# Altium PCB PCB_Rapsi_Hat.PcbDoc
Units mm, origin at the board's own origin, x right, y up, seen from the top; angles counter-clockwise.
Board outline 39 x 54 mm, 2 copper layers (Top Layer, Bottom Layer); 21 components, 15 nets, 97 pads, 3 vias.
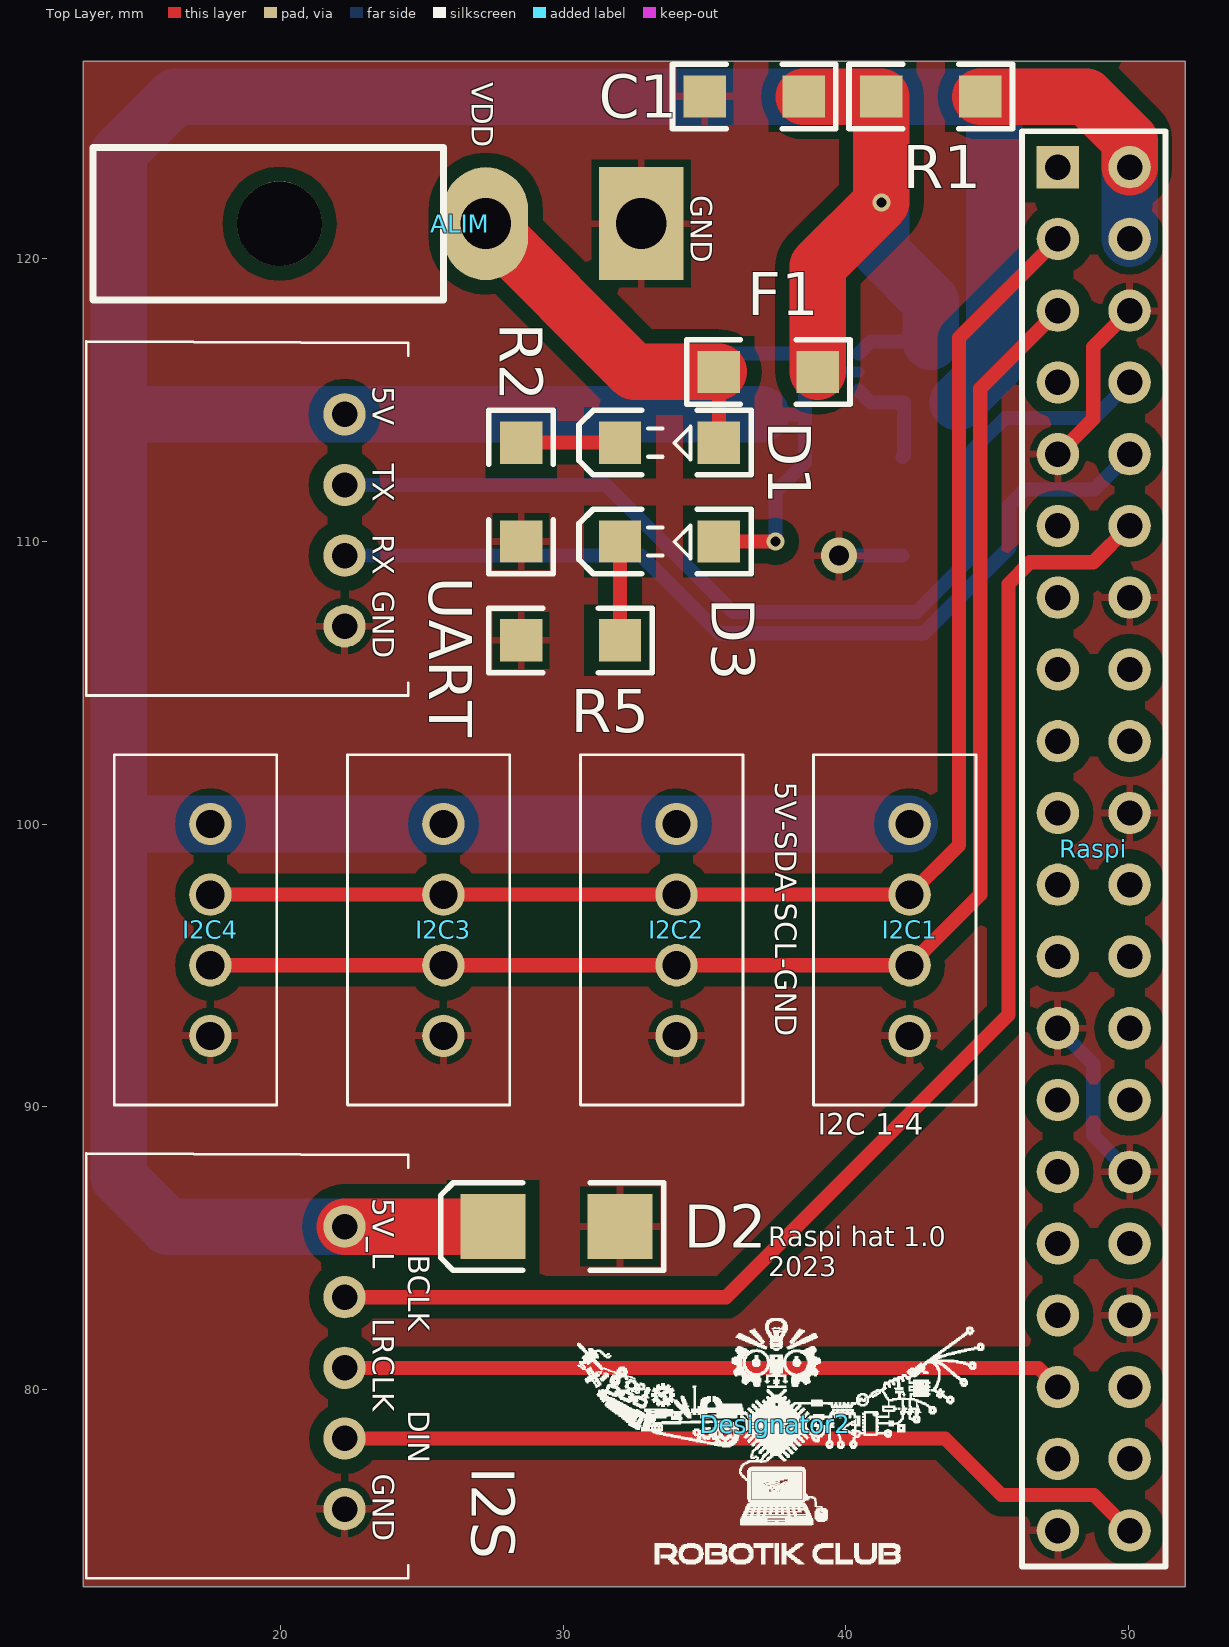
[diagram p0: Top Layer view]
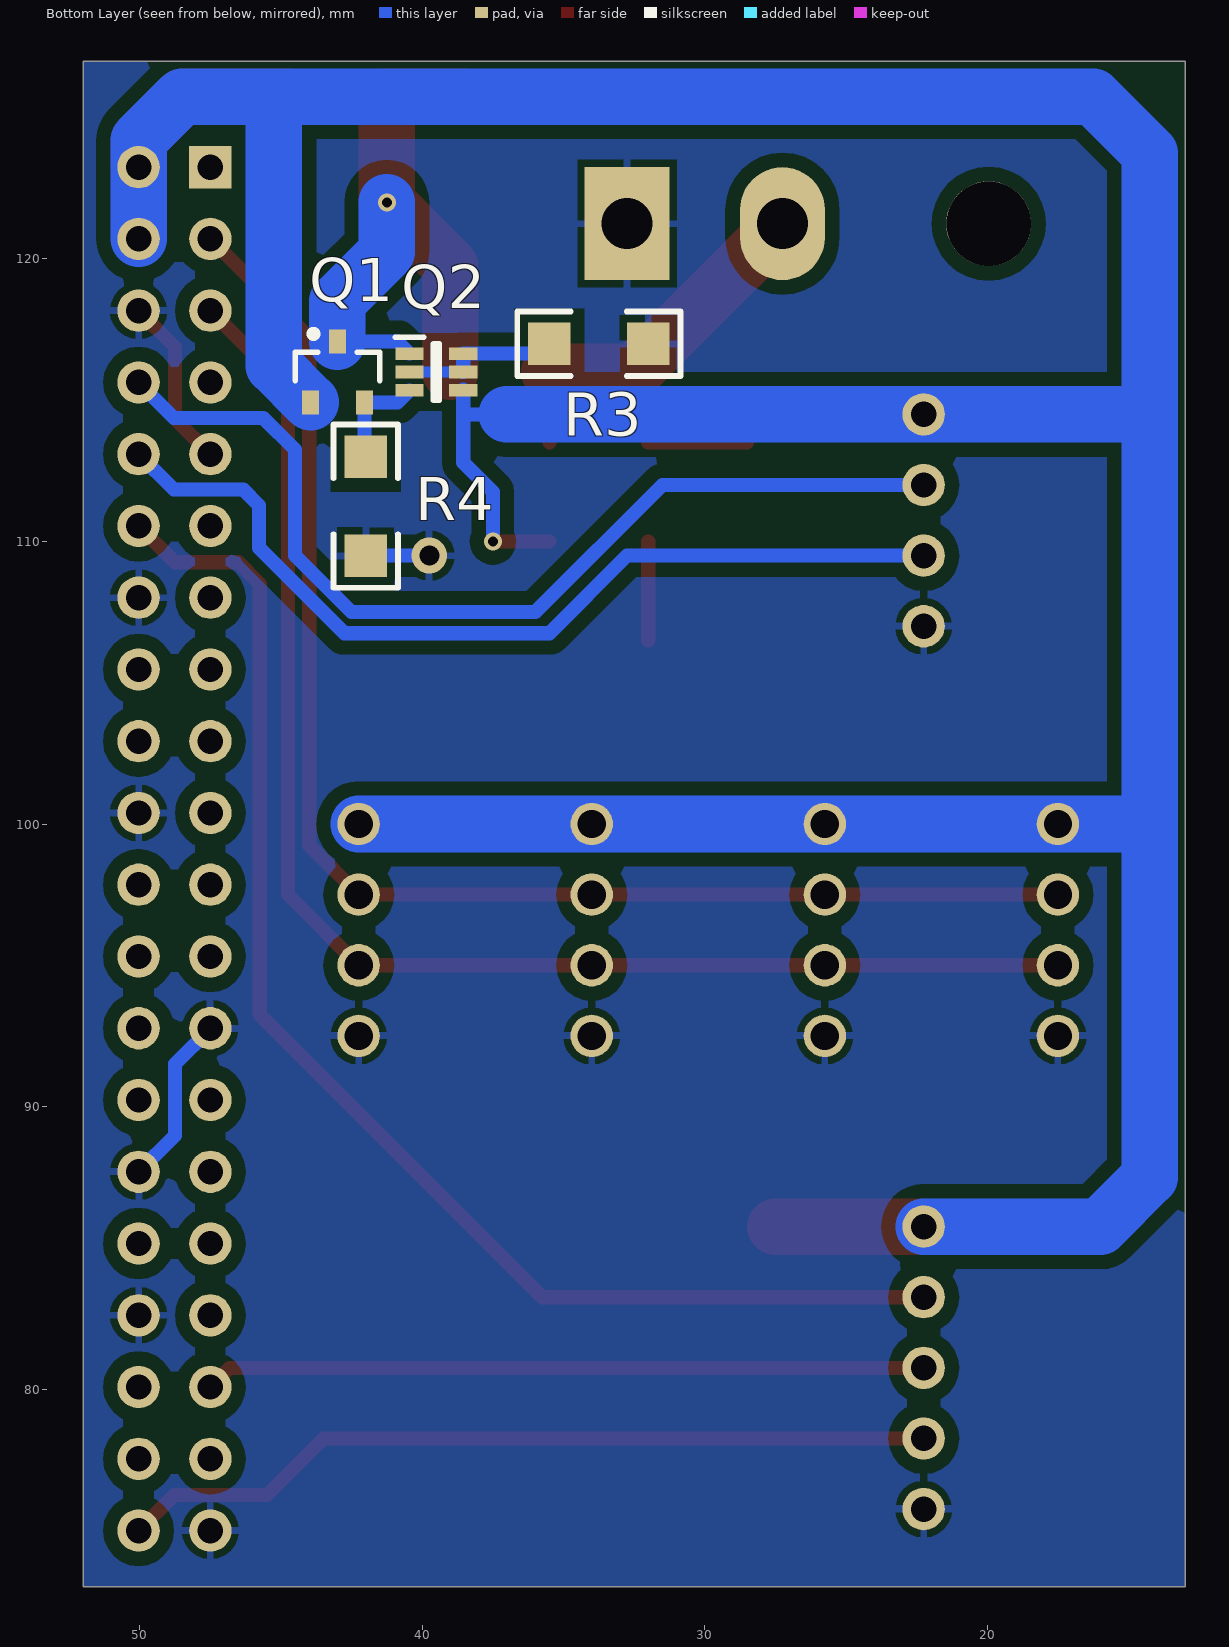
[diagram p1: Bottom Layer view, seen from below]
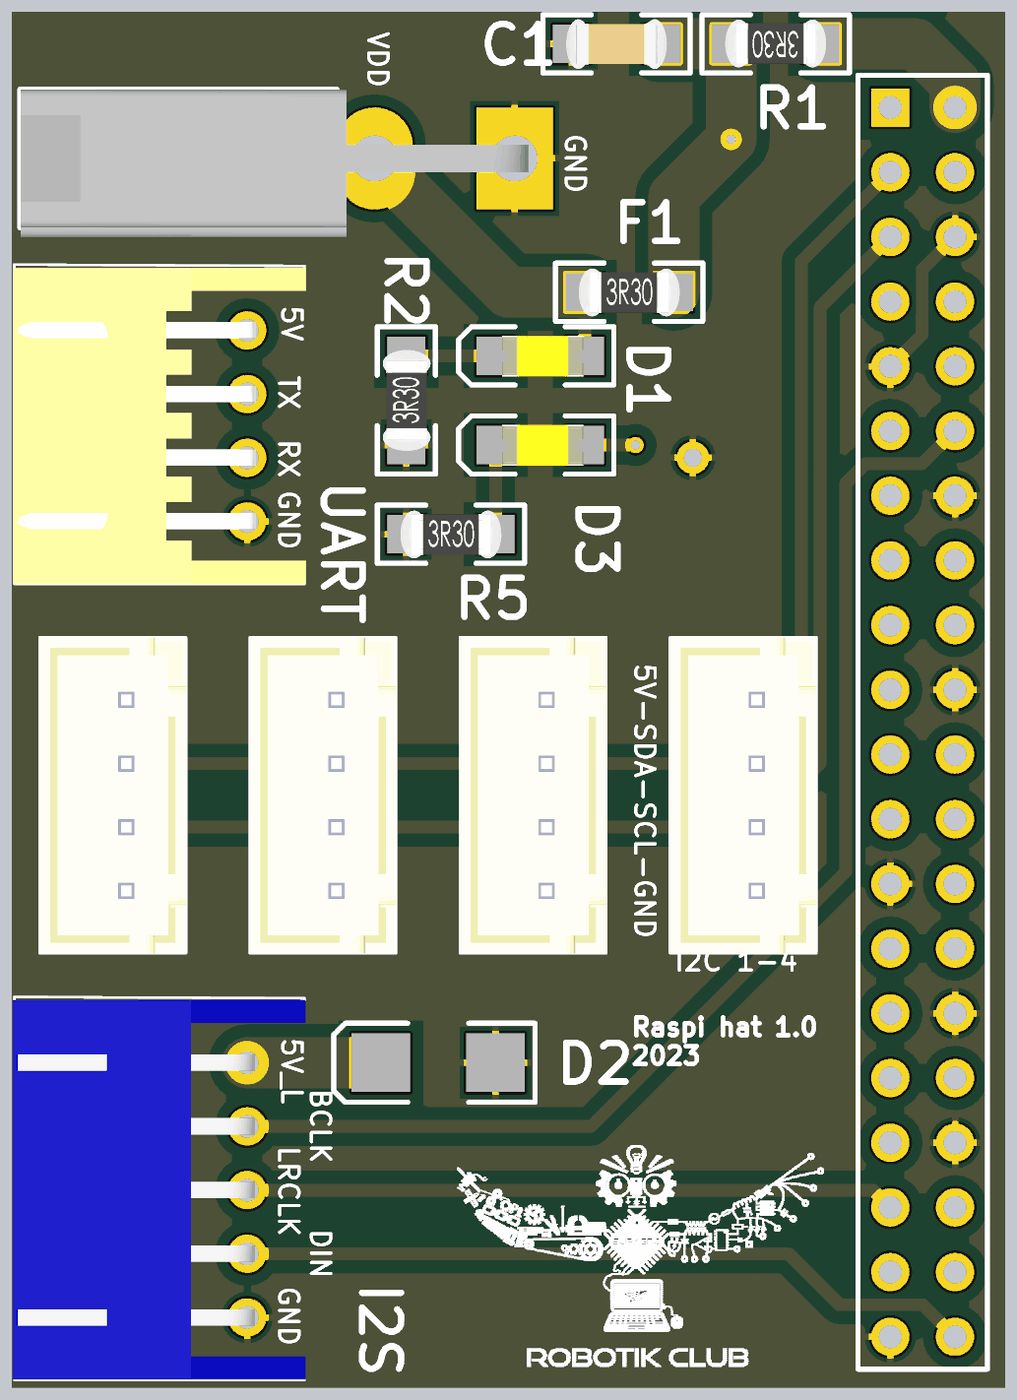
[diagram p2: 3D render of the assembled board from above, using the file's embedded part models]
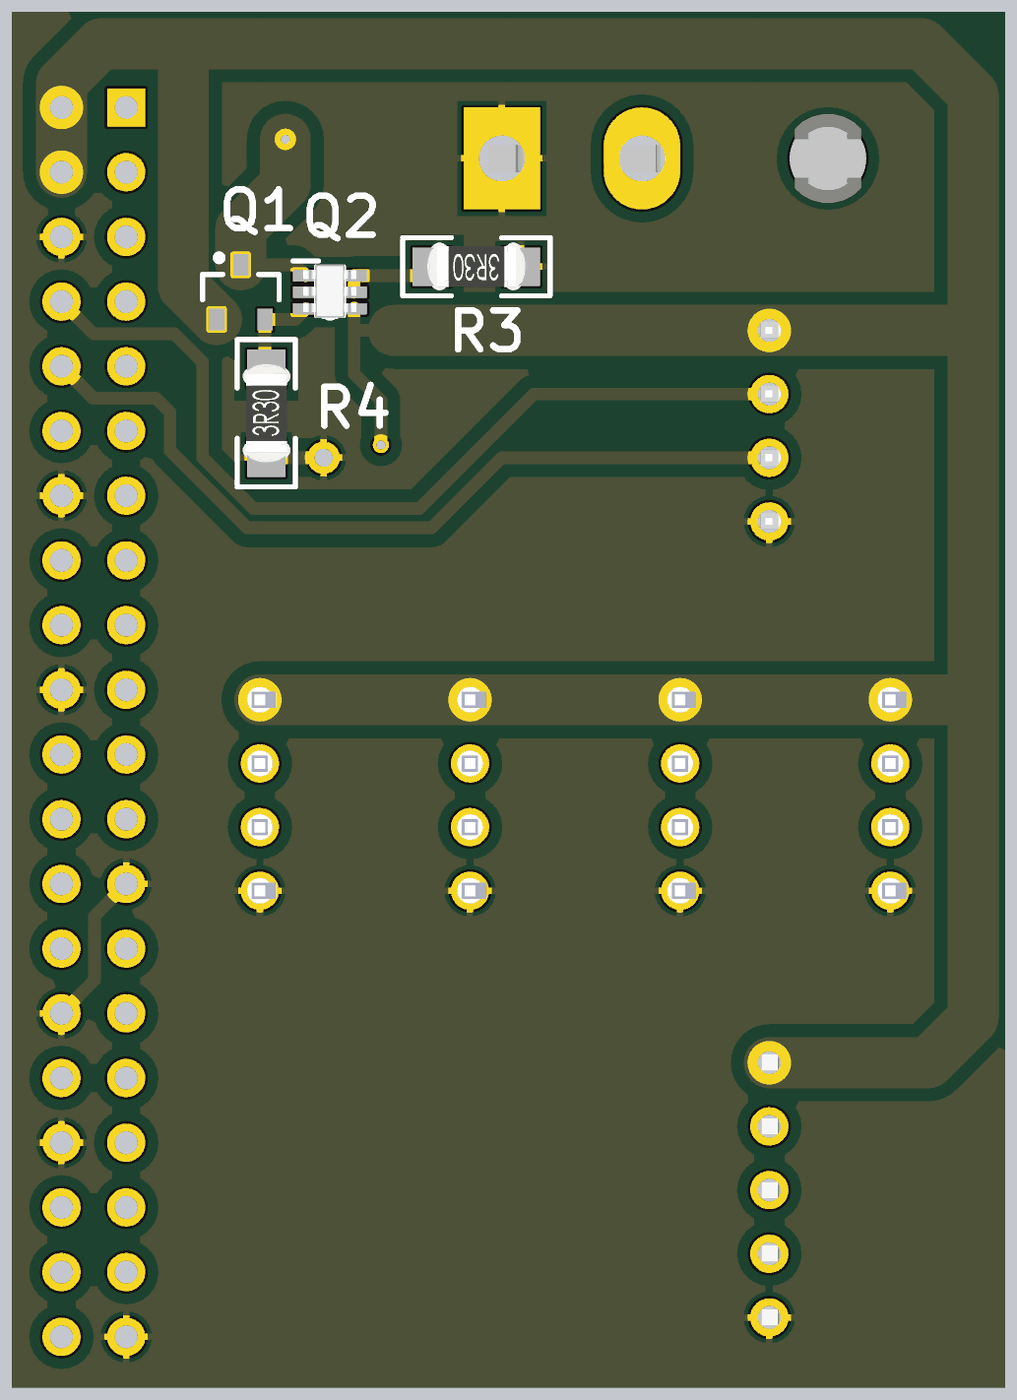
[diagram p3: 3D render of the assembled board from below, using the file's embedded part models]

## Layer stack, top to bottom
Top Solder: solder mask 0.0102, Solder Resist, Dk 3.5
Top Layer: signal copper 0.0356
Dielectric 1: dielectric 0.32, FR-4, Dk 4.8
Bottom Layer: signal copper 0.0356
Bottom Solder: solder mask 0.0102, Solder Resist, Dk 3.5

## Board outline
13,127 13,73 52,73 52,127

## Design rules (kind name [scope] priority, off if disabled: settings)
Clearance Clearance_2 [InNamedPolygon('Top Layer-GND')] p1: gap=0.508 ignorepadtopadclearanceinfootprint=FALSE except(0: Arc-Hole Track-Hole SMDPad-Hole THPad-Hole Via-Hole Fill-Hole Poly-Hole Region-Hole Text-Hole)
Clearance Clearance_1 [InNamedPolygon('Bottom Layer-GND')] p2: gap=0.508 ignorepadtopadclearanceinfootprint=FALSE except(0: Arc-Hole Track-Hole SMDPad-Hole THPad-Hole Via-Hole Fill-Hole Poly-Hole Region-Hole Text-Hole)
PolygonConnect [All] p1: connectstyle=Relief reliefconductorwidth=0.254 reliefentries=4 polygonreliefangle="90 Angle" airgapwidth=0.254
RoutingVias [All] p1: holewidth=0.711 width=1.27 viastyle="Through Hole" minholewidth=0.356 minwidth=0.635 maxholewidth=0.711 maxwidth=1.27
SolderMaskExpansion [All] p1: expansion=0.102 istentingtop=FALSE
Width [All] p1: maxlimit=2 minlimit=0.254 preferedwidth=0.5
30 further rules are at their usual default settings.

## Components (designator, comment, footprint, x,y, rotation, side; value= is the part's Value field where it differs from the comment)
ALIM "Header 2H" Molex_MiniFitJr_2x1H 27.25,121.25 r180 top
C1 "Cap" "Capacitor 1206" 36.75,125.75 r0 top
D1 "5V_IN" KP-3216SEC 33.75,113.5 r180 top
D2 "SMBJ5.0A" SMB 29.75,85.75 r180 top
D3 "5V_L" KP-3216SEC 33.75,110 r180 top
Designator2 "Comment" Logo_lowres 37.5,78.75 r0 top
F1 "3A" "Resistor 1206" 37.25,116 r0 top
I2C1 "Header 4V" B4BXHALFSN 42.25,92.5 r90 top
I2C2 "Header 4V" B4BXHALFSN 34,92.5 r90 top
I2C3 "Header 4V" B4BXHALFSN 25.75,92.5 r90 top
I2C4 "Header 4V" B4BXHALFSN 17.5,92.5 r90 top
I2S "Header 5H" S5B-XH-A 22.25,75.75 r90 top
Q1 "DMG2305UX" SOT23_L 43,116 r90 bottom
Q2 "BCM857BS" SOT65P210X110-6N 39.5,116 r180 bottom
R1 "Res2" "Resistor 1206" 43,125.75 r180 top
R2 "Res2" "Resistor 1206" 28.5,111.75 r90 top
R3 "Res2" "Resistor 1206" 33.75,117 r0 bottom
R4 "Res2" "Resistor 1206" 42,111.25 r90 bottom
R5 "Res2" "Resistor 1206" 30.25,106.5 r0 top
Raspi "Header 20X2" HDR2X20 47.5,123.25 r270 top
UART "Header 4H" S4B-XH-A 22.25,107 r90 top

## Footprints (in the part's own frame and the unit in brackets; to place one, negate y for a bottom-side part, rotate by r counter-clockwise, add the part's x,y. Pads: shape width x height; smd on the part's side, far side on the other; paste and mask are expansions set on the pad)
B4BXHALFSN [mm]
  round 1.5 hole 1: 1(0,0) 2(2.5,0) 3(5,0) 4(7.5,0)
  silkscreen extent -2.45,-2.35 9.95,3.4, body extent -2.45,-2.35 9.95,3.4, height 7.52
"Capacitor 1206" [mm]
  rect 1.5x1.5 smd: 1(-1.75,0) 2(1.75,0)
  silkscreen extent -2.89,-1.14 2.89,1.14, body extent -1.98,-0.99 1.98,0.96, height 1.3
HDR2X20 [mm] "Connector; Header; 20x2 Position"
  rect 1.5x1.5 hole 0.9: 1(0,0)
  round 1.5 hole 0.9: 2(0,2.54) 3(2.54,0) 4(2.54,2.54) 5(5.08,0) 6(5.08,2.54) 7(7.62,0) 8(7.62,2.54) 9(10.16,0) 10(10.16,2.54) 11(12.7,0) 12(12.7,2.54) 13(15.24,0) 14(15.24,2.54) 15(17.78,0) 16(17.78,2.54) 17(20.32,0) 18(20.32,2.54) 19(22.86,0) 20(22.86,2.54) 21(25.4,0) 22(25.4,2.54) 23(27.94,0) 24(27.94,2.54) 25(30.48,0) 26(30.48,2.54) 27(33.02,0) 28(33.02,2.54) 29(35.56,0) 30(35.56,2.54) 31(38.1,0) 32(38.1,2.54) 33(40.64,0) 34(40.64,2.54) 35(43.18,0) 36(43.18,2.54) 37(45.72,0) 38(45.72,2.54) 39(48.26,0) 40(48.26,2.54)
  silkscreen extent -1.27,-1.27 49.53,3.81
KP-3216SEC [mm]
  rect 1.5x1.5 smd: 1(-1.75,0) 2(1.75,0)
  silkscreen extent -2.89,-1.14 3.2,1.14, body extent -1.7,-0.79 1.5,0.81, height 1.1
Logo_lowres [mm]
  silkscreen extent -7.01,-4.93 7.39,3.76
Molex_MiniFitJr_2x1H [mm] "Connecteur Molex 2"
  rect 3x4 hole 1.8: 1(-5.5,0)
  oval 3x4 hole 1.8: 2(0,0)
  round 3 hole 3 unplated: 3(7.3,0)
  silkscreen extent 1.5,-2.7 13.9,2.7, body extent -6.03,-2.7 13.9,3.1, height 11.01
"Resistor 1206" [mm]
  rect 1.5x1.5 smd: 1(-1.75,0) 2(1.75,0)
  silkscreen extent -2.89,-1.14 2.89,1.14, body extent -1.98,-0.95 1.98,0.93, height 0.55
S4B-XH-A [mm]
  round 1.5 hole 0.9: 1(0,0) 2(2.5,0) 3(5,0) 4(7.5,0)
  silkscreen extent -2.45,-2.26 10.08,9.14, body extent -2.44,-2.32 9.96,9.18, height 6.15
S5B-XH-A [mm]
  round 1.5 hole 0.9: 1(0,0) 2(2.5,0) 3(5,0) 4(7.5,0) 5(10,0)
  silkscreen extent -2.45,-2.26 12.58,9.14, body extent -2.45,-2.3 12.45,9.2, height 6.15
SMB [mm] "DO-214-AA/SMB; 2 C-Bend Leads; Body 5.3 x 3.6 mm, inc. leads (LxW)"
  rect 2.3x2.3 smd: 1(-2.25,0) 2(2.25,0)
  silkscreen extent -3.8,-1.55 4.1,1.55
SOT23_L [mm] "SOT23, 3-Leads, Body 2.9x1.3mm, Pitch 0.95mm, Lead Span 2.3mm - Reverse Pinning, IPC High Density"
  rect 0.85x0.6 smd: 1(1.075,0) 2(-1.075,-0.95) 3(-1.075,0.95)
  silkscreen extent -0.3,-1.5 1.47,1.5, body extent -0.7,-1.5 0.7,1.5, height 1.1
SOT65P210X110-6N [mm]
  rect 1x0.45 smd: 1(-0.95,0.65) 2(-0.95,0) 3(-0.95,-0.65) 4(0.95,-0.65) 5(0.95,0) 6(0.95,0.65)
  silkscreen extent -1.45,-1 0.1,1.22, body extent -1.05,-1.06 1.05,1.09, height 0.95

## Part data
ALIM: "Header, 2-Pin, Right Angle"
C1: "Capacitor"
D1 D3: library part LED2, "Typical RED, GREEN, YELLOW, AMBER GaAs LED"
D2: library part "D Zener", "Zener Diode"
F1: library part "Fuse 2", "Fuse"
I2C1 I2C2 I2C3 I2C4: library part "Header 4H", "Header, 4-Pin, Right Angle"
I2S: "Header, 5-Pin, Right Angle"
Q1: library part MOSFET-P, "P-Channel MOSFET"
Q2: "Transistor"
R1 R2 R3 R4 R5: "Resistor"
Raspi: "Header, 20-Pin, Dual row"
UART: "Header, 4-Pin, Right Angle"

## Via types
v1: diameter 0.635, hole 0.356, Top Layer to Bottom Layer, 2 vias
v2: diameter 1.27, hole 0.711, Top Layer to Bottom Layer, 1 vias

## Nets (pads, with @x,y where several pads share a name; then routed paths per layer and width w, separated by ;. In a path a pad name is that pad's centre, name@x,y a point inside that pad or via, vN(x,y) a via of type N, cw(c..) or ccw(c..) an arc to the next point about the centre after c; other vN are vias at no path point)
5V_IN: ALIM.2 D1.1 F1.1 | length 12.9
  Top Layer w0.5: D1.1 F1.1
  Top Layer w2: ALIM.2 32.5,116 F1.1
5V_L: D2.2 D3.1 I2C1.4 I2C2.4 I2C3.4 I2C4.4 I2S.5 Q1.3 Q2.4 R1.1 Raspi.2 Raspi.4 UART.4 | length 169.3
  Top Layer w0.5: D3.1 v1(37.5,110)
  Top Layer w2: I2S.5 D2.2 ; R1.1 48.5,125.75 50.04,124.21 Raspi.2
  Bottom Layer w0.5: 37,114.5 38.55,114.5 ; v1(37.5,110) 37.5,111.75 38.55,112.8 38.55,114.5 ; Q2.4@38.55,115.373 Q2.4 38.55,114.5
  Bottom Layer w2: I2S.5 16,85.75 14.25,87.5 14.25,100 ; 37,114.5 14.25,114.5 ; I2C1.4 I2C2.4 I2C3.4 I2C4.4 14.25,100 ; Q1.3 45.25,116.225 45.25,125.75 ; Raspi.4 Raspi.2 50.04,124.21 48.5,125.75 16.25,125.75 14.25,123.75 14.25,114.5 ; 14.25,100 14.25,114.5
GND: ALIM.1 C1.1 D2.1 I2C1.1 I2C2.1 I2C3.1 I2C4.1 I2S.1 R2.1 R3.1 R4.1 R5.1 Raspi.6 Raspi.9 Raspi.14 Raspi.20 Raspi.25 Raspi.30 Raspi.34 Raspi.39 UART.1 | length 14.5
  Top Layer w0.5: Raspi.9 48.75,114.34 48.75,115.103 48.754,115.107 48.754,116.884 Raspi.6
  Bottom Layer w0.5: v2(39.75,109.5) R4.1 ; Raspi.25 47.5,92.75 48.75,91.5 48.75,88.98 Raspi.30
NetC1_2: C1.2 F1.2 Q1.1 Q2.1 R1.2 | length 21.8
  Top Layer w2: C1.2 R1.2 v1(41.25,122) 39,119.75 F1.2
  Bottom Layer w0.5: Q2.1 40.875,117.075 Q1.1
  Bottom Layer w2: v1(41.25,122) 41.25,120.25 43,118.5 Q1.1
NetD1_2: D1.2 R2.2 | length 3.5
  Top Layer w0.5: R2.2 D1.2
NetD3_2: D3.2 R5.2 | length 3.5
  Top Layer w0.5: R5.2 D3.2
NetQ1_2: Q1.2 Q2.3 R4.2 | length 3.7
  Bottom Layer w0.5: Q2.3 40.875,114.925 Q1.2 42.05,113.05 R4.2
NetQ2_2: Q2.2 Q2.5 Q2.6 R3.2 | length 5.7
  Bottom Layer w0.4: Q2.5 Q2.2
  Bottom Layer w0.5: R3.2@35.5,116.5 35.65,116.65 Q2.6 Q2.5
T_GPIO_18: I2S.4 Raspi.12 | length 48
  Top Layer w0.5: I2S.4 35.75,83.25 45.75,93.25 45.75,96.325 45.75,108.5 46.514,109.264 48.754,109.264 Raspi.12
T_GPIO_19: I2S.3 Raspi.35 | length 25.5
  Top Layer w0.5: I2S.3 46.82,80.75 Raspi.35
T_GPIO_21: I2S.2 Raspi.40 | length 29.1
  Top Layer w0.5: I2S.2 43.5,78.25 45.5,76.25 48.78,76.25 Raspi.40
T_I2C_SCL: I2C1.2 I2C2.2 I2C3.2 I2C4.2 Raspi.5 | length 50.1
  Top Layer w0.5: I2C4.2 I2C3.2 I2C2.2 I2C1.2 44.75,97.5 44.75,115.42 Raspi.5
T_I2C_SDA: I2C1.3 I2C2.3 I2C3.3 I2C4.3 Raspi.3 | length 50.1
  Top Layer w0.5: I2C4.3 I2C3.3 I2C2.3 I2C1.3 44,99.25 44,117.21 Raspi.3
T_UART_RX: Raspi.10 UART.2 | length 32.4
  Bottom Layer w0.5: UART.2 32.75,109.5 35.5,106.75 42.75,106.75 45.778,109.778 45.778,111.278 46.336,111.836 48.786,111.836 Raspi.10
T_UART_TX: Raspi.8 UART.3 | length 35.2
  Bottom Layer w0.5: UART.3 31.5,112 36,107.5 42.5,107.5 44.5,109.5 44.5,112.5 44.5,113.25 45.626,114.376 48.786,114.376 Raspi.8
pads on no net: ALIM.3 Raspi.1 Raspi.7 Raspi.11 Raspi.13 Raspi.15 Raspi.16 Raspi.17 Raspi.18 Raspi.19 Raspi.21 Raspi.22 Raspi.23 Raspi.24 Raspi.26 Raspi.27 Raspi.28 Raspi.29 Raspi.31 Raspi.32 Raspi.33 Raspi.36 Raspi.37 Raspi.38

## Polygon pours and split planes (outlines as drawn)
GND on Top Layer "Top Layer-GND" (solid, remove dead copper, pour order 0): 13,127 52,127 52,73 13,73
GND on Bottom Layer "Bottom Layer-GND" (solid, remove dead copper, pour order 2): 13,127 52,127 52,73 13,73

## Silkscreen, mask and mechanical layers (free items; w line width, h text height)
Top Overlay:
  text "VDD" at 26.75,126.25 h0.76 r270
  text "GND" at 34.5,122.25 h0.76 r270
  text "5V" at 23.25,115.5 h0.76 r270
  text "TX" at 23.25,112.75 h0.76 r270
  text "RX" at 23.25,110.25 h0.76 r270
  text "GND" at 23.25,108.25 h0.76 r270
  text "5V-SDA-SCL-GND" at 37.5,101.5 h0.76 r270
  text "I2C 1-4" at 39,89 h0.76
  text "5V_L" at 23.25,86.75 h0.76 r270
  text "BCLK" at 24.5,84.75 h0.76 r270
  text "Raspi hat 1.0 / 2023" at 37.25,84 h0.7
  text "LRCLK" at 23.25,82.5 h0.76 r270
  text "DIN" at 24.5,79.25 h0.76 r270
  text "GND" at 23.25,77 h0.76 r270
Mechanical 1:
  the board outline again, w0.254